# Altium PCB OBD-II.PcbDoc
Units mil, origin at the board's own origin, x right, y up, seen from the top; angles counter-clockwise.
Board outline 2675 x 2505 mil, 2 copper layers (Top Layer, Bottom Layer); 60 components, 38 nets, 247 pads, 153 vias.
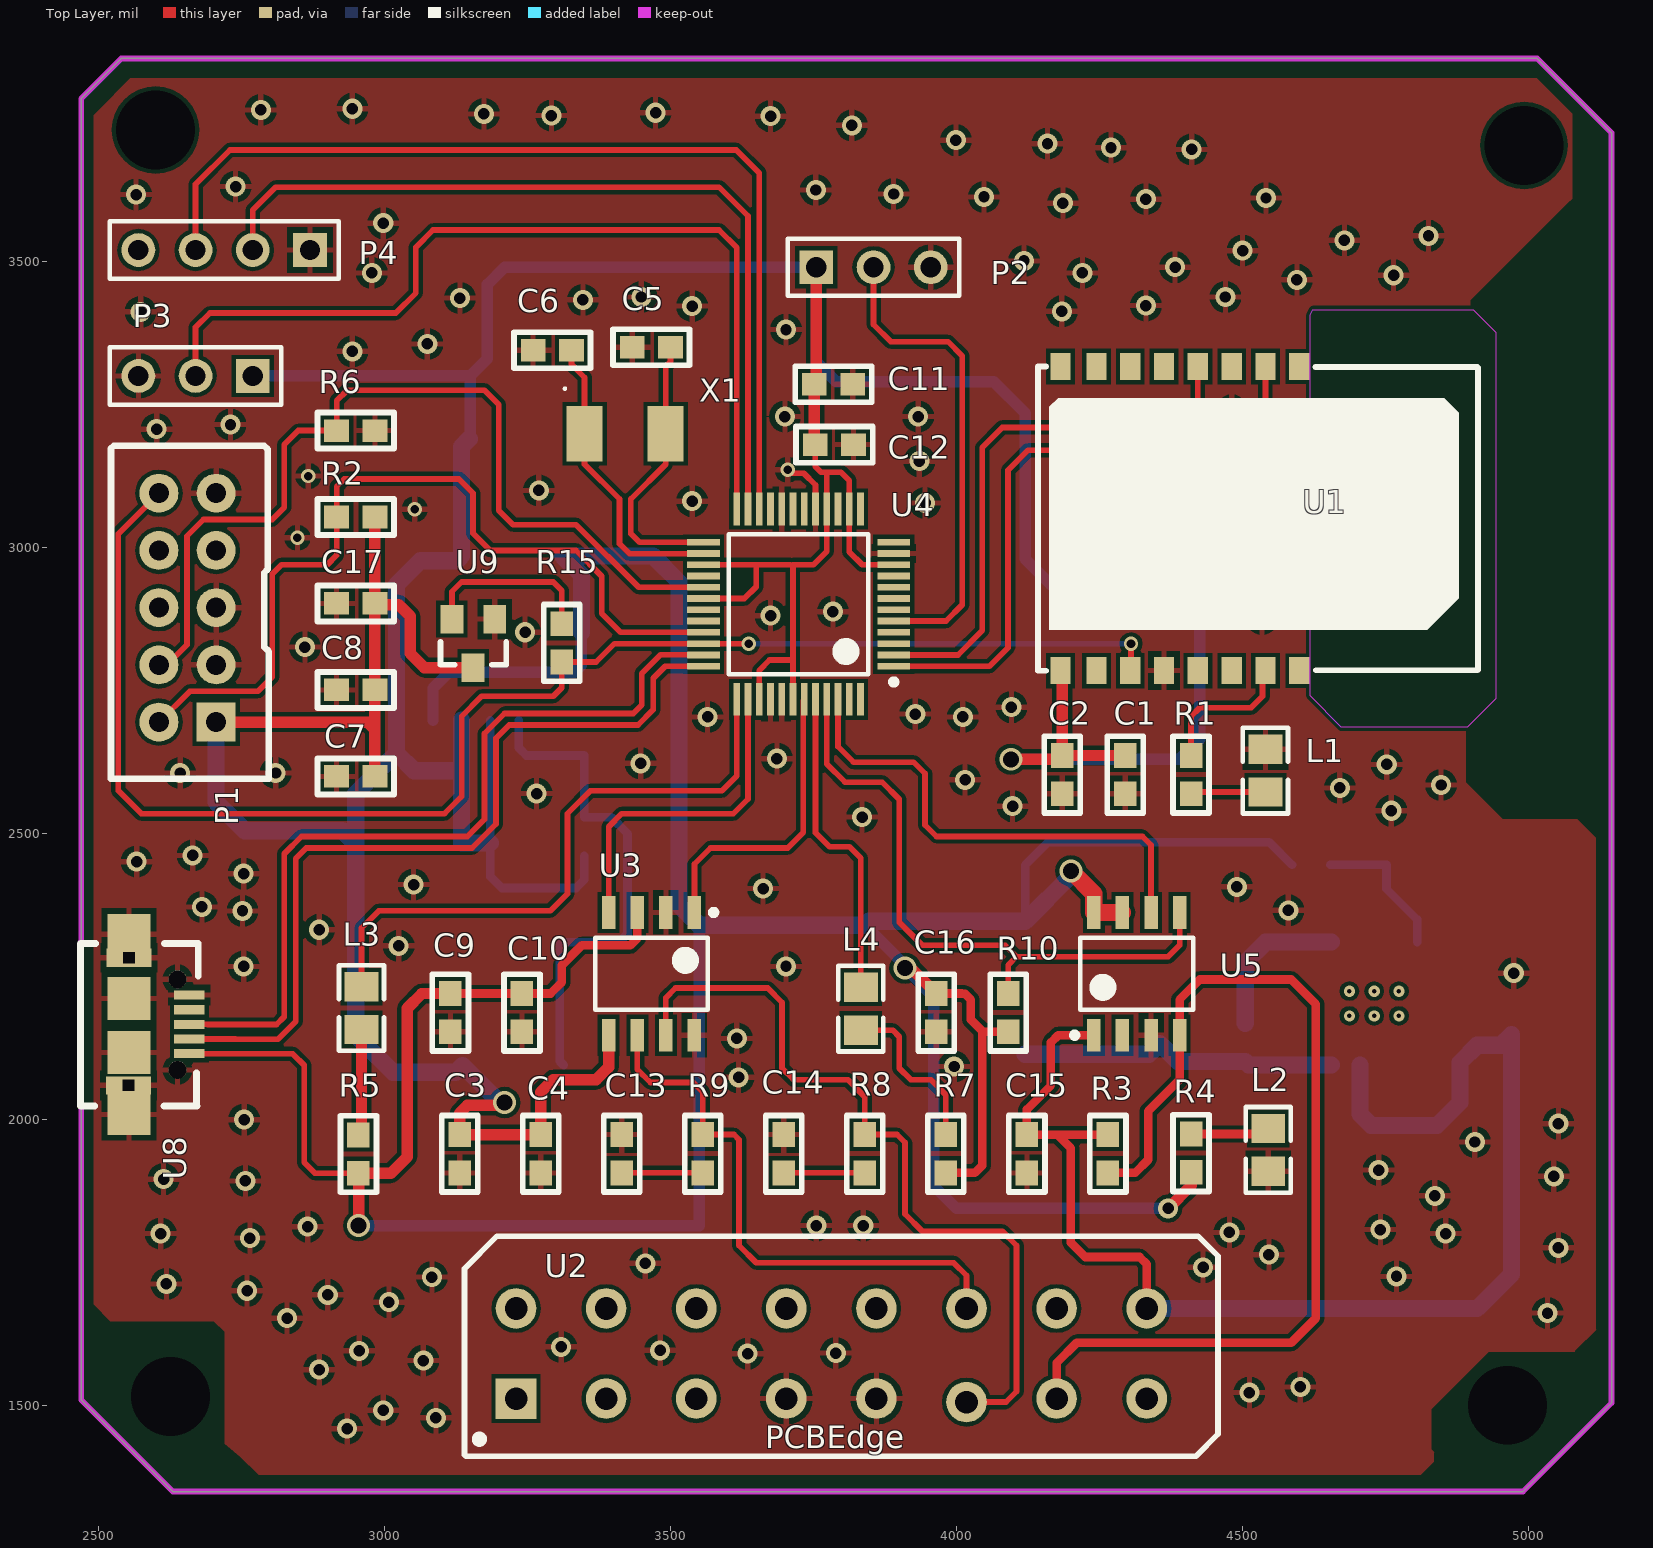
[diagram p0: Top Layer view]
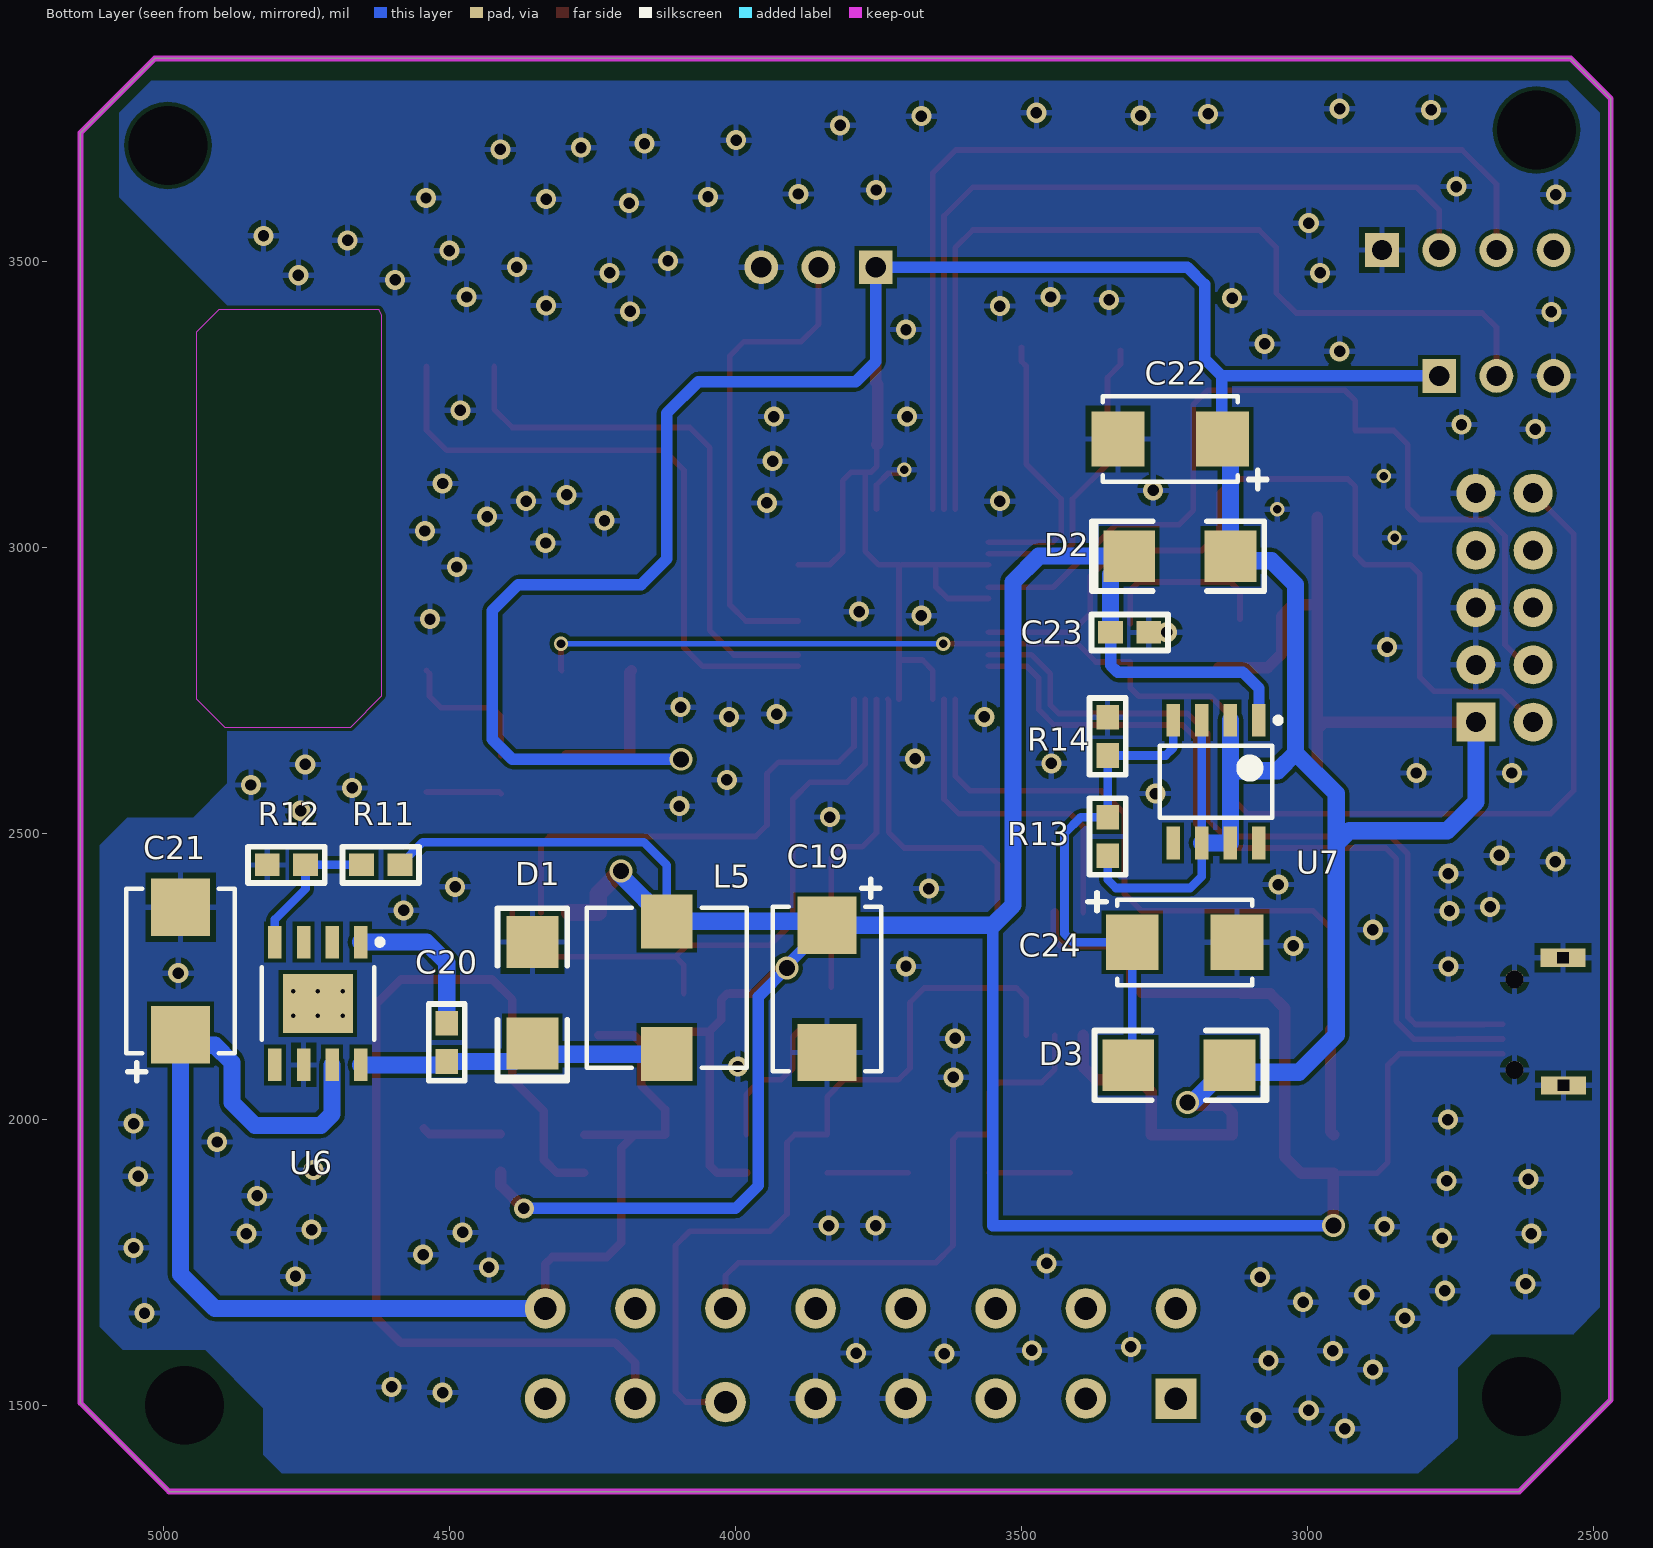
[diagram p1: Bottom Layer view, seen from below]

## Layer stack, top to bottom
Top Solder: solder mask 0.4, Solder Resist, Dk 3.5
Top Layer: signal copper 1.4
Dielectric 1: dielectric 12.6, FR-4, Dk 4.8
Bottom Layer: signal copper 1.4
Bottom Solder: solder mask 0.4, Solder Resist, Dk 3.5

## Board outline
2470,1510 2470,3785 2540,3855 5015,3855 5145,3725 5145,1505 4990,1350 2630,1350

## Design rules (kind name [scope] priority, off if disabled: settings)
Clearance [All] p1: gap=7
DiffPairsRouting [All] p1: maxlimit=10 minlimit=10 mostfreqgap=10 toplayer_minwidth=10 toplayer_maxwidth=15 toplayer_prefwidth=15 bottomlayer_minwidth=10 bottomlayer_maxwidth=15 bottomlayer_prefwidth=15 maxuncoupledlength=500
PolygonConnect [All] p1: connectstyle=Relief reliefconductorwidth=10 reliefentries=4 polygonreliefangle="90 Angle" airgapwidth=10
RoutingVias [All] p1: holewidth=28 width=40 viastyle="Through Hole" minholewidth=15 minwidth=25 maxholewidth=30 maxwidth=40
SolderMaskExpansion [All] p1: expansion=4
Width [All] p1: maxlimit=50 minlimit=10 preferedwidth=15
29 further rules are at their usual default settings.

## Classes and differential pairs
component class USB: U8
component class Power: C19 C20 C21 C22 C23 C24 D1 D2 D3 L5 R11 R12 R13 R14 U6 U7
component class Core: C3 C4 C5 C6 C7 C8 C9 C10 C11 C12 C13 C14 C15 C16 C17 L2 L3 L4 P1 P2 P3 P4 R2 R3 R4 R5 R6 R7 R8 R9 R10 R15 U2 U3 U4 U5 U9 X1
component class Bluetooth: C1 C2 L1 R1
differential pair NewDifferentialPair1: +D+ -D-
differential pair NewDifferentialPair2: +NetC5_1 -NetC6_1

## Components (designator, comment, footprint, x,y, rotation, side; value= is the part's Value field where it differs from the comment)
C1 "0.1uF" 0603 4295.39,2603.13 r90 top
C2 "10uF" 0603 4185.39,2603.13 r90 top
C3 "10uF" 0603 3132.02,1940.53 r90 top
C4 "0.1uF" 0603 3273.64,1940.53 r90 top
C5 "22pF" 0603 3466.54,3350.39 r180 top
C6 "22pF" 0603 3293.46,3345.39 r180 top
C7 "4.7uF" 0603 2950,2599.61 r0 top
C8 "0.1uF" 0603 2950,2750.76 r0 top
C9 "10uF" 0603 3115,2187.1 r270 top
C10 "0.1uF" 0603 3240,2187.1 r270 top
C11 "10uF" 0603 3785,3285 r0 top
C12 "0.1uF" 0603 3786.54,3179.61 r0 top
C13 "560pF" 0603 3414.47,1940.53 r270 top
C14 "560pF" 0603 3697.72,1940.53 r270 top
C15 "0.1uF" 0603 4122.59,1940.53 r270 top
C16 "0.1uF" 0603 3965,2187.1 r90 top
C17 "0.1uF" 0603 2950,2901.91 r0 top
C19 "220uF" CAPM-7.0*4.5 3840,2228.67 r270 bottom
C20 "0.01uF" 0603 4505,2135.18 r270 bottom
C21 "100uF/16V" CAPM-7.0*4.5 4970,2260 r90 bottom
C22 "10uF/16V" CAPM-5.5*3.3 3240,3190 r0 bottom
C23 "0.1uF" 0603 3311,2852 r0 bottom
C24 "10uF/16V" CAPM-5.5*3.3 3215,2310 r180 bottom
D1 "B340A" DO214-AC 4355,2221.8 r270 bottom
D2 "1N4007" DO214-AC 3223.25,2985 r0 bottom
D3 "1N4007" DO214-AC 3225,2095 r180 bottom
L1 "LED" 0805 4540,2610 r90 top
L2 "LED" 0805 4545,1947.4 r270 top
L3 "LED" 0805 2960,2195 r90 top
L4 "LED" 0805 3832.86,2193.98 r90 top
L5 "15uH" 7*7*4-15uH 4120,2230.64 r90 bottom
P1 "Debug" JATG_10pin 2705.97,2695 r180 top
P2 "" HDR1X3 3755,3490 r0 top
P3 "" HDR1X3 2770,3300 r180 top
P4 "downloader" HDR1X4 2870,3520 r180 top
R1 "470" 0603 4409.61,2603.13 r270 top
R2 "10K" 0603 2950,3053.85 r180 top
R3 "510R" 0603 4265,1940.53 r90 top
R4 "330R" 0603 4410.39,1941.54 r90 top
R5 "330R" 0603 2955,1940 r90 top
R6 "10K" 0603 2950,3205 r180 top
R7 "330R" 0603 3981.75,1940.53 r90 top
R8 "100R" 0603 3840.13,1940.53 r90 top
R9 "100R" 0603 3556.89,1940.53 r90 top
R10 "3.3K" 0603 4090,2187.1 r270 top
R11 "10K" 0603 4620,2445 r180 bottom
R12 "3.24K" 0603 4785,2445 r180 bottom
R13 "470R" 0603 3350,2495 r270 bottom
R14 "820R" 0603 3350,2670 r270 bottom
R15 "100K" 0603 3310.39,2833.46 r90 top
U1 "HM-13" HM-13 4142.36,3316.5 r270 top
U2 "OBD-Connector" OBD-MaleConnector 3230.08,1512.52 r0 top
U3 "TJF1051T / 3" TJF1051 3460,2253 r270 top
U4 "LPC1549" LPC1549JBD48 3725,2905 r180 top
U5 "MC33660EFR2" SOP-8 4315,2255 r90 top
U6 "TPS5430" TPS5430 4730,2203.08 r270 bottom
U7 "LM317L" LM317L 3160,2590 r270 bottom
U8 "MicroUSB" Micro-USB 2553.68,2324.07 r0 top
U9 "IMP809TEUR-T" SOT23-3 3155,2790 r180 top
X1 "12MHZ" 12Mhz-DFN 3420,3200 r180 top

## Footprints (in the part's own frame and the unit in brackets; to place one, negate y for a bottom-side part, rotate by r counter-clockwise, add the part's x,y. Pads: shape width x height; smd on the part's side, far side on the other; paste and mask are expansions set on the pad)
7*7*4-15uH [mm] "Precision Wire Wound Inductor, 2-Leads, Body 7.00x7.00mm, IPC Medium Density"
  rect 2.4x2.3 smd: 1(-2.95,0) 2(2.95,0)
  silkscreen extent -3.55,-3.55 3.55,3.55
12Mhz-DFN [mm]
  rect 1.6x2.45 smd: 1(1.78,0.025) 2(-1.82,0.025)
  silkscreen extent 2.6,-2.02 2.7,-1.92, body extent -2.65,-1.57 2.65,1.63, height 0.45
0603 [mm]
  rect 1.1x1 smd: 1(-0.85,0.01) 2(0.85,0.01)
  silkscreen extent -1.7,-0.79 1.7,0.81
0805 [mm]
  rect 1.3x1.5 smd: 1(-0.95,0) 2(0.95,0)
  silkscreen extent -1.9,-1 1.9,1
CAPM-5.5*3.3 [mm]
  rect 2.35x2.45 smd: 1(-2.325,0) 2(2.325,0)
  silkscreen extent -4.29,-1.9 3,2.2
CAPM-7.0*4.5 [mm] "Molded Capacitor, 2-Leads, Body 7.00x4.50mm, IPC Medium Density"
  rect 2.55x2.6 smd: 1(-2.825,0) 2(2.825,0)
  silkscreen extent -4.87,-2.4 3.65,2.4
DO214-AC [mm]
  rect 2.3x2.3 smd: 1(-2.25,0) 2(2.25,0)
  silkscreen extent -3.75,-1.55 3.9,1.55
HDR1X3 [mm] "Connector; Header; 3 Position"
  rect 1.5x1.5 hole 0.9: 1(0,0)
  round 1.5 hole 0.9: 2(2.54,0) 3(5.08,0)
  silkscreen extent -1.27,-1.27 6.35,1.27
HDR1X4 [mm] "Connector; Header; 4 Position"
  rect 1.5x1.5 hole 0.9: 1(0,0)
  round 1.5 hole 0.9: 2(2.54,0) 3(5.08,0) 4(7.62,0)
  silkscreen extent -1.27,-1.27 8.89,1.27
HM-13 [mm]
  rect 1.2x0.9 smd: 1(0,11.6) 2(0,10.1) 3(0,8.6) 4(0,7.1) 5(0,5.6) 6(0,4.1) 7(0,2.6) 8(0,1) 9(13.5,1) 10(13.5,2.6) 11(13.5,4.1) 12(13.5,5.6) 13(13.5,7.1) 14(13.5,8.6) 15(13.5,10.1) 16(13.5,11.6)
  silkscreen extent 0,0 13.51,19.53
JATG_10pin [mil]
  rect 68x68 hole 35: 1(0,0)
  round 68 hole 35: 2(100,0) 3(0,-100) 4(100,-100) 5(0,-200) 6(100,-200) 7(0,-300) 8(100,-300) 9(0,-400) 10(100,-400)
  silkscreen extent -92,-483 184,99
LM317L [mm]
  rect 1.45x0.6 smd: 1(-2.75,1.905) 2(-2.75,0.635) 3(-2.75,-0.635) 4(-2.75,-1.905) 5(2.7,-1.905) 6(2.7,-0.635) 7(2.7,0.635) 8(2.7,1.905)
  silkscreen extent -2.88,-2.5 1.57,2.88
LPC1549JBD48 [mm]
  rect 1.45x0.3 smd: 1(-4.2,2.852) 2(-4.2,2.352) 3(-4.2,1.852) 4(-4.2,1.352) 5(-4.2,0.852) 6(-4.2,0.352) 7(-4.2,-0.148) 8(-4.2,-0.648) 9(-4.2,-1.148) 10(-4.2,-1.648) 11(-4.2,-2.148) 12(-4.2,-2.648) 25(4.25,-2.648) 26(4.25,-2.148) 27(4.25,-1.648) 28(4.25,-1.148) 29(4.25,-0.648) 30(4.25,-0.148) 31(4.25,0.352) 32(4.25,0.852) 33(4.25,1.352) 34(4.25,1.852) 35(4.25,2.352) 36(4.25,2.852)
  rect 0.3x1.45 smd: 13(-2.725,-4.123) 14(-2.225,-4.123) 15(-1.725,-4.123) 16(-1.225,-4.123) 17(-0.725,-4.123) 18(-0.225,-4.123) 19(0.275,-4.123) 20(0.775,-4.123) 21(1.275,-4.123) 22(1.775,-4.123) 23(2.275,-4.123) 24(2.775,-4.123) 37(2.775,4.327) 38(2.275,4.327) 39(1.775,4.327) 40(1.275,4.327) 41(0.775,4.327) 42(0.275,4.327) 43(-0.225,4.327) 44(-0.725,4.327) 45(-1.225,4.327) 46(-1.725,4.327) 47(-2.225,4.327) 48(-2.725,4.327)
  silkscreen extent -4.32,-3 3.13,3.68
Micro-USB [mm]
  rect 2x0.8 hole 0.5 square: 1(-0.025,-6.706) 1(0,-1.041)
  rect 1.9x1.8 smd: 1(0,-8) 1(0,0)
  rect 1.9x1.9 smd: 1(0,-5.25) 1(0,-2.85)
  round 0.8 hole 0.8: 1(2.15,-6.02) 1(2.15,-2)
  rect 1.35x0.4 smd: 1(2.675,-2.7) 2(2.675,-3.35) 3(2.675,-4) 4(2.675,-4.65) 5(2.675,-5.3)
  silkscreen extent -2.16,-7.62 3.07,-0.41
OBD-MaleConnector [mm]
  rect 1.8x1.8 hole 1: 1(0,0)
  round 1.8 hole 1: 2(4,0) 3(8,0) 4(12,0) 5(16,0) 6(20,-0.152) 7(24,0) 8(28,0) 9(0,4) 10(4,4) 11(8,4) 12(12,4) 13(16,4) 14(20,4) 15(24,4) 16(28,4)
  silkscreen extent -2.29,-2.57 31.17,7.21
SOP-8 [mm]
  rect 1.45x0.6 smd: 1(-2.725,1.905) 2(-2.725,0.635) 3(-2.725,-0.635) 4(-2.725,-1.905) 5(2.725,-1.905) 6(2.725,-0.635) 7(2.725,0.635) 8(2.725,1.905)
  silkscreen extent -2.85,-2.5 1.6,2.88
SOT23-3 [mil]
  rect 40x50 smd: 1(-37.99,-85) 2(37.01,-85) 3(0.01,0)
  silkscreen extent -58,-45 57,-5
TJF1051 [mm]
  rect 1.45x0.6 smd: 1(-2.776,2.083) 2(-2.776,0.813) 3(-2.776,-0.457) 4(-2.776,-1.727) 5(2.674,-1.727) 6(2.674,-0.457) 7(2.674,0.813) 8(2.674,2.083)
  silkscreen extent -2.9,-2.32 1.55,3.06
TPS5430 [mm]
  rect 1.45x0.6 smd: 1(-2.725,1.905) 2(-2.725,0.635) 3(-2.725,-0.635) 4(-2.725,-1.905) 5(2.725,-1.905) 6(2.725,-0.635) 7(2.725,0.635) 8(2.725,1.905)
  rect 2.6x3.1 smd: 9(0,0)
  silkscreen extent -2.85,-2.5 1.6,2.88

## Part data
C1 C2 C3 C4 C5 C6 C7 C8 C9 C10 C11 C12 C13 C14 C15 C16 C17 C20 C23: library part Cap1, "ceramic"
C19 C21 C22 C24: library part Cap3, "aluminum"
D1: library part B340A-13-F
L5: library part Inductor
P1: library part JTAG_10Pin
P2 P3: library part "Header 3", "Header, 3-Pin"
P4: library part "Header 4", "Header, 4-Pin"
R1 R2 R3 R4 R5 R6 R7 R8 R9 R10 R11 R12 R13 R14 R15: library part Res
U2: library part OBD-MaleHead
U4: library part LPC1549JBD48
U8: library part MicroUSB_B
X1: library part OSC

## Free pads (board coordinates)
  oval 0x141.73 hole 137.8: 0(2626,1516) 1(4963,1501) 2(4992,3703) 3(2600,3730)

## Via types
v1: diameter 35, hole 20, Top Layer to Bottom Layer, 136 vias
v2: diameter 25, hole 15, Top Layer to Bottom Layer, 6 vias
v3: diameter 19.68, hole 7.87, Top Layer to Bottom Layer, 6 vias
v4: diameter 40, hole 28, Top Layer to Bottom Layer, 5 vias

## Nets (pads, with @x,y where several pads share a name; then routed paths per layer and width w, separated by ;. In a path a pad name is that pad's centre, name@x,y a point inside that pad or via, vN(x,y) a via of type N, cw(c..) or ccw(c..) an arc to the next point about the centre after c; other vN are vias at no path point)
3.3V: C1.2 C2.2 C3.2 C4.2 C7.2 C8.2 C11.1 C12.1 C17.2 C22.1 D2.1 D3.2 P1.1 P2.1 P3.1 R2.1 R13.2 U1.9 U3.5 U4.10 U4.14 U4.16 U4.27 U4.30 U4.39 U4.42 U7.2 U7.3 U7.6 U7.7 U9.3 | length 9140.4
  Top Layer w10: U4.30 3629.16,2910.84 3650,2931.68 3650,2969.9 ; U4.27 3650,2969.9 ; U4.39 3655.1,2785.1 3673.32,2803.32 3710.83,2803.32 3714.16,2800 ; 3710,2969.9 3650,2969.9 ; U4.42 3714.16,2800 ; C12.1 3753.07,3141.93 3763.21,3131.79 3773.21,3131.79 ; U4.10 3835.1,2969.9 3812.58,2992.42 U4.14 3812.58,3117.42 3798.21,3131.79 3773.21,3131.79 ; 3714.16,2800 3714.16,2969.9 3749.9,2969.9 3773.21,2993.21 U4.16 3773.21,3131.79
  Top Layer w20: P1.1 2970,2695 2983.46,2681.54 ; C7.2 2983.46,2681.54 ; R2.1 C17.2 ; U9.3 3070,2790 3045,2815 3045,2880 3025,2900 2985.77,2900 C17.2 ; v4(3210,2030) 3205,2025 3145,2025 3131.62,2011.62 C3.2 C4.2 3273.25,2048.25 3295,2070 3370,2070 3392,2092 U3.5 ; C12.1 3751.54,3181.54 C11.1 3755,3288.86 P2.1 ; v4(4095,2630) 4178.41,2630 C2.2 ; U1.9 4185,2781.73 C2.2 ; C1.2 C2.2 ; 2983.46,2681.54 C8.2 C17.2
  Bottom Layer w15: U7.3 U7.6 3185,2425 3205,2405 3335,2405 3349.61,2419.61 R13.2
  Bottom Layer w20: P1.1 P1.1@2713,2687.97 ; P3.1 3150,3300 ; C22.1 3150,3191.54 3150,3300 ; v4(4095,2630) 4390,2630 4425,2665 4425,2890 4380,2935 4165,2935 4120,2980 4120,3235 4065,3290 3790,3290 3755,3325 P2.1 3210,3490 3180,3460 3180,3330 3150,3300
  Bottom Layer w30: P1.1 2705.97,2555.03 2756,2505 2927,2505 2950,2482 ; U7.2 3135,2600 ; C22.1 3134.67,3176.2 D2.1 3126.67,2977 3063,2977 3021,2935 3021,2641 ; U7.6 U7.7 3135,2600 ; v4(3210,2030) 3201.42,2030 D3.2 3124.42,2083 3015,2083 2950,2148 2950,2482 ; 2950,2482 2950,2570 3021,2641 ; 3021,2641 3052,2610 3125,2610 3135,2600
5V: C9.1 C10.1 C16.2 C19.1 C23.2 D2.2 L5.2 R4.1 R5.1 R7.1 R10.2 R11.2 U3.3 U5.7 U5.8 U7.1 U8.5 | length 6931.4
  Top Layer w10: U8.5 2659.33,2115.08 2839.92,2115.08 2860,2095 2860,1925 2878.46,1906.54 R5.1
  Top Layer w15: C9.1 C10.1 3290.57,2220.57 3310,2240 3310,2270 3345,2305 3430,2305 3442,2317 U3.3 ; C16.2 4009.43,2220.57 4010,2220 4015,2220 4025,2210 4025,2175 4045,2155 ; R7.1 4032.06,1907.06 4045,1920 4045,2155 ; R10.2 4046.36,2153.64 4045,2155
  Top Layer w20: v4(2955,1815) 2955,1906.14 R5.1 3011.54,1906.54 3040,1935 3040,2195 3065.57,2220.57 C9.1 ; v4(3910,2265) 3920.17,2265 C16.2 ; v1(4370,1845) 4410,1885 R4.1
  Top Layer w30: v4(4200,2435) 4240,2395 U5.8 U5.7
  Bottom Layer w15: L5.2 4120,2445 4160,2485 4546.93,2485 R11.2
  Bottom Layer w20: v4(2955,1815) 3550.11,1815 3550.11,2339.89 ; U7.1 3085,2754 3113,2782 3332,2782 3344.46,2794.46 C23.2 ; C19.1 3910,2269.89 v4(3910,2265) 3960,2215 3960,1885 4000,1845 v1(4370,1845)
  Bottom Layer w30: C23.2 3344.46,2952.37 D2.2 3470,2985 3515,2940 3515,2375 3550.11,2339.89 C19.1 3846.89,2346.78 L5.2 4200,2426.78 v4(4200,2435)
12V: C15.1 C21.1 R3.2 U2.16 U5.1 U6.7 | length 2371.8
  Top Layer w15: U5.1 4177.72,2147.72 4165,2135 4165,2060 4122.98,2017.98 C15.1 4176.01,1973.99 ; R3.2 4176.01,1973.99 ; U2.16 4332.44,1747.56 4320,1760 4225,1760 4200,1785 4200,1950 4176.01,1973.99
  Bottom Layer w30: U2.16 4910,1670 4970,1730 C21.1 4951.22,2130 4910,2130 4880,2100 4880,2030 4840,1990 4725,1990 4705,2010 U6.7
ADJ: C24.1 D3.1 R13.1 R14.2 U7.4 | length 881.3
  Bottom Layer w15: U7.4 3235,2650 3248.46,2636.54 R14.2 R13.1 3396.54,2528.46 3425,2500 3425,2325 3410,2310 C24.1 3306.54,2102.05 D3.1
BL_RX: U1.4 U4.2 | length 971.5
  Top Layer w10: U4.2 4002.42,2812.42 4045,2855 4045,3175 4080,3210 4390,3210 4421.89,3241.89 U1.4
BL_TX: U1.2 U4.1 | length 1113.5
  Top Layer w10: U4.1 4057.73,2792.73 4090,2825 4090,3135 4125,3170 4505,3170 4540,3205 U1.2
BOOT: C20.1 U6.1 | length 271.2
  Bottom Layer w30: C20.1 4504.61,2274.61 4540.36,2310.36 U6.1
CAN_H: R8.2 U2.6 U3.7 | length 1401.3
  Top Layer w10: U3.7 3492,2213 3509,2230 3670,2230 3695,2205 3695,2090 3715,2070 3810,2070 3839.74,2040.26 R8.2 3896.01,1973.99 3910,1960 3910,1835 3940,1805 4080,1805 4105,1780 4105,1525 4086.52,1506.52 U2.6
CAN_L: R9.2 U2.14 U3.6 | length 994.1
  Top Layer w10: U3.6 3442,2088 3465,2065 3540,2065 3556.49,2048.51 R9.2 3611.01,1973.99 3620,1965 3620,1780 3650,1750 3995,1750 4017.48,1727.52 U2.14
D+: U4.35 U8.3 | length 1453.6
  Top Layer w10: U8.3 2690.57,2166.59 2690.91,2166.26 2811.26,2166.26 2825,2180 2825,2465 2855,2495 3145,2495 3175,2525 3175,2675 3210,2710 3435,2710 3450,2725 3450,2780 3482.73,2812.73 U4.35@3557.66,2812.73
D-: U4.36 U8.4 | length 1455.9
  Top Layer w10: U8.4 2739.95,2141 2740.28,2140.67 2813.95,2140.67 2845,2171.72 2845,2456.72 2863.28,2475 3153.28,2475 3195,2516.72 3195,2666.72 3218.28,2690 3443.28,2690 3470,2716.72 3470,2771.72 3491.02,2792.73 U4.36
GND: C1.1 C2.1 C3.1 C4.1 C5.2 C6.2 C7.1 C8.1 C9.2 C10.2 C11.2 C12.2 C13.1 C14.1 C15.2 C16.1 C17.1 C19.2 C21.2 C22.2 C23.1 C24.2 D1.1 L1.2 L2.2 P1.3 P1.5 P1.9 P2.3 P3.3 P4.1 R6.1 R12.1 R14.1 U1.12 U2.4 U2.5 U3.2 U3.8 U4.11 U4.17 U4.20 U4.40 U4.41 U5.3 U6.6 U8.1 U9.1 | length 101.6
  Top Layer w10: v2(3705,3136) 3711,3130 3733,3130 3753.53,3109.47 U4.17
  other v1: 2935,1460 3090,1479 2998,1492 4512,1523 4601,1533 2886,1563 3068,1579 3635,1591 3789,1592 2956,1596 3482,1597 3309,1603 2830,1653 5033,1662 3008,1681 2901,1694 2760,1701 2619,1713 3083,1725 4769,1726 4431,1742 3456,1749 4546,1764 5052,1776 2765,1793 2609,1801 4855,1801 4477,1803 4741,1808 2866,1813 3755,1815 3837,1815 4836,1867 2757,1893 2614,1896 5044,1901 4738,1912 4906,1961 5052,1993 2755,2000 3619,2074 3996,2093 3616,2142 4974,2256 2754,2268 3702,2268 3025,2304 2886,2332 2752,2365 4580,2366 2681,2372 3662,2404 4490,2407 3051,2411 2754,2430 2567,2451 2665,2462 3835,2529 4760,2540 4098,2548 3266,2570 4670,2580 4847,2585 4015,2594 2643,2606 2810,2606 4752,2621 3448,2623 3686,2631 3565,2704 4011,2704 3928,2709 4096,2721 2861,2826 3246,2852 4534,2875 3675,2881 3784,2888 4487,2966 4332,3008 4543,3029 4229,3047 4434,3054 3945,3078 3538,3081 4366,3081 4295,3092 3270,3100 4512,3112 3935,3151 2602,3207 2731,3215 3700,3229 3933,3229 4481,3240 2944,3343 3075,3356 3702,3381 2574,3412 4184,3413 3538,3422 4331,3423 3347,3433 3132,3436 3449,3438 4470,3438 4595,3468 4764,3476 2978,3480 4220,3480 4382,3490 4118,3501 4500,3519 4678,3537 4825,3545 2998,3567 4186,3602 4331,3609 4541,3611 4048,3613 2566,3617 3890,3618 3754,3625 2740,3631 4411,3696 4270,3699 4159,3706 3999,3712 3817,3738 3675,3754 3292,3755 3174,3758 3474,3760 2784,3765 2944,3767
  other v2: 2848,3017 3053,3067 2867,3125
ISP0: P2.2 U4.5 | length 844.3
  Top Layer w10: P2.2 3855,3390 3885,3360 3985,3360 4010,3335 4010,2900 3981.47,2871.47 U4.5
ISP1: P3.2 U4.24 | length 1617.7
  Top Layer w10: P3.2 2670,3385 2695,3410 3020,3410 3055,3445 3055,3525 3085,3555 3585,3555 3615.73,3524.27 U4.24
K-LINE: R3.1 U2.7 U5.4 | length 1749.8
  Top Layer w15: U2.7 4174.96,1574.96 4210,1610 4585,1610 4628,1653 4628,2202 4585,2245 4425,2245 4390,2210 U5.4 4390,2070 4335,2015 4335,1930 4312.06,1907.06 R3.1
NetC5_1: C5.1 U4.25 X1.2 | length 487.5
  Top Layer w10: C5.1 3500,3325.32 3491.65,3316.97 X1.2 3491.65,3145.77 3430.79,3084.91 3430.79,3024.21 3445.73,3009.27 U4.25
NetC6_1: C6.1 U4.26 X1.1 | length 527.1
  Top Layer w10: C6.1 3326.93,3320.32 3349.92,3297.32 X1.1 3349.92,3145.77 3410.79,3084.91 3410.79,3006.72 3428.24,2989.27 U4.26@3557.66,2989.27
NetC13_2: C13.2 R9.1 | length 141.6
  Top Layer w10: C13.2 R9.1
NetC14_2: C14.2 R8.1 | length 141.6
  Top Layer w10: C14.2 R8.1
NetC20_2: C20.2 D1.2 L5.1 U6.8 | length 558.3
  Bottom Layer w30: L5.1 4336.28,2114.5 D1.2 4386.5,2101.72 C20.2 4510.53,2095.8 U6.8
NetL1_1: L1.1 R1.2 | length 131.2
  Top Layer w10: R1.2 4412.94,2572.6 L1.1
NetL2_1: L2.1 R4.2 | length 139.1
  Top Layer w15: R4.2 4535.2,1975 L2.1
NetL3_1: L3.1 R5.2 | length 186.4
  Top Layer w20: R5.2 2960,1978.86 L3.1
NetL4_1: L4.1 R7.2 | length 297.1
  Top Layer w10: L4.1 3888.43,2156.57 3900,2145 3900,2090 3920,2070 3955,2070 3981.36,2043.64 R7.2
NetR1_1: R1.1 U1.15 | length 255
  Top Layer w10: R1.1 4410,2705 4425,2720 4515,2720 4535,2740 4535,2780 U1.15
NetR10_1: R10.1 U4.45 U5.5 | length 1131.2
  Top Layer w10: U4.45 3773.21,2621.79 3805,2590 3870,2590 3900,2560 3900,2345 3940,2305 4085,2305 4105,2285 ; R10.1 4090.39,2270.39 4105,2285 ; U5.5 4390,2305 4370,2285 4105,2285
NetR15_2: R15.2 U9.2 | length 311.3
  Top Layer w10: U9.2 3117.99,2922.99 3135,2940 3295,2940 3310,2925 R15.2
NetU3_1: U3.1 U4.43 | length 530.9
  Top Layer w10: U3.1 3542,2447 3570,2475 3705,2475 3732.06,2502.06 3732.06,2732.88 U4.43
NetU3_4: U3.4 U4.38 | length 587.4
  Top Layer w10: U3.4 3392,2512 3415,2535 3610,2535 3635.42,2560.42 U4.38
NetU4_46: U4.46 U5.6 | length 871.4
  Top Layer w10: U4.46 3792.9,2652.1 3820,2625 3925,2625 3945,2605 3945,2515 3965,2495 4325,2495 4340,2480 U5.6
PIN_37: L3.2 U4.37 | length 1084.3
  Top Layer w10: L3.2 2960,2335 2990,2365 3290,2365 3320,2395 3320,2535 3360,2575 3590,2575 3615.73,2600.73 U4.37
PIN_44: L4.2 U4.44 | length 556.6
  Top Layer w10: U4.44 3753.53,2501.47 3777.86,2477.14 3812.86,2477.14 3832.86,2457.14 L4.2
R\S\T\: P1.10 R15.1 U1.11 U4.34 | length 2615
  Top Layer w10: P1.10 2535,3024.03 2535,2575 2575,2535 3105,2535 3135,2565 3135,2705 3170,2740 3295,2740 3310,2755 R15.1 3370,2800 3402.1,2832.1 U4.34 v2(3637.1,2832.1) ; U1.11 4305,2786.22 v2(4305,2832.1)
  Bottom Layer w10: v2(3637.1,2832.1) v2(4305,2832.1)
RX: P4.3 U4.22 | length 1754.1
  Top Layer w10: P4.3@2670,3495 P4.3 2670,3635 2730,3695 3615,3695 3655.1,3654.9 U4.22
SWDCLK: P1.4 R6.2 U4.29 | length 1607.7
  Top Layer w10: P1.4 2620,2795 2655,2830 2655,3020 2684,3049 2804,3049 2825,3070 2825,3180 2849.61,3204.61 R6.2 2916.54,3256.54 2935,3275 3175,3275 3200,3250 3200,3065 3225,3040 3335,3040 3444.47,2930.53 U4.29
SWDIO: P1.2 R2.2 U4.33 | length 1493.7
  Top Layer w10: P1.2 2660,2749.03 2686.88,2749.03 ; 2686.91,2749 2779,2749 2804,2774 2804,2954 2820,2970 2900,2970 2916.54,2986.54 R2.2 2916.54,3106.54 2930,3120 3130,3120 3155,3095 3155,3025 3185,2995 3335,2995 3380,2950 3380,2885 3413.21,2851.79 U4.33
TX: P4.2 U4.23 | length 1485.1
  Top Layer w10: P4.2 2770,3590 2810,3630 3585,3630 3635.42,3579.58 U4.23
VFB: R11.1 R12.2 U6.4 | length 255.2
  Bottom Layer w15: R11.1 R12.2 4751.54,2403.46 4805,2350 U6.4
pads on no net: P1.6 P1.7 P1.8 P4.4 U1.1 U1.3 U1.5 U1.6 U1.7 U1.8 U1.10 U1.13 U1.14 U1.16 U2.1 U2.2 U2.3 U2.8 U2.9 U2.10 U2.11 U2.12 U2.13 U2.15 U4.3 U4.4 U4.6 U4.7 U4.8 U4.9 U4.12 U4.13 U4.15 U4.18 U4.19 U4.21 U4.28 U4.31 U4.32 U4.47 U4.48 U5.2 U6.2 U6.3 U6.5 U6.9 U7.5 U7.8 U8.2
copper on no net:
  other v3: 4686.69,2181.43 4730,2181.43 4773.31,2181.43 4686.69,2224.73 4730,2224.73 4773.31,2224.73

## Polygon pours and split planes (outlines as drawn)
GND on Bottom Layer "GND" (solid, remove dead copper, pour order 6): 2738,1443 2738,1566 2721,1583 2679,1625 2535,1625 2535,1626 2496,1665 2489,1672 2489,2184 2489,3760 2492,3763 2545,3816 2624,3816 5021,3816 5050,3787 5077,3760 5077,3614 5077,3612 5029,3564 4888,3423 4888,3257 4888,2588 4890,2586 4948,2528 4975,2528 5063,2528 5097,2494 5111,2480 5111,2206 5111,1638 5097,1624 5071,1598 4953,1598 4927,1598 4828,1499 4825,1496 4825,1429 4825,1414 4813,1402 4793,1382 2807,1382
GND on Top Layer "GND" (solid, remove dead copper, pour order 10): 2721,1434 2721,1624 2721,1629 2705,1645 2702,1648 2580,1648 2521,1648 2500,1669 2492,1677 2492,1762 2492,3756 2499,3763 2556,3820 2568,3820 5014,3820 5068,3766 5076,3758 5076,3652 5076,3610 5067,3601 4898,3432 4898,3427 4898,3403 4901,3400 4908,3393 4908,3391 4908,2712 4890,2694 4890,2669 4890,2590 4948,2532 4955,2525 5080,2525 5085,2525 5106,2504 5117,2493 5117,2469 5117,1634 5118,1633 5081,1596 5081,1594 4930,1594 4914,1578 4830,1494 4830,1488 4830,1424 4835,1419 4834,1418 4834,1402 4822,1390 4811,1379 4800,1379 2780,1379 2748,1411

## Keep-outs
Keep-Out Layer:
  region: 4622.86,3416.11 4902.86,3416.11 4942.86,3376.11 4942.86,2736.11 4892.86,2686.11 4672.86,2686.11 4617.86,2741.11 4617.86,3406.11
  lines w10: 2470,1510 2630,1350 4990,1350 5145,1505 5145,3725 5015,3855 4870,3855 2540,3855 2470,3785 2470,3765 2470,1510

## Silkscreen, mask and mechanical layers (free items; w line width, h text height)
Top Overlay:
  region: 4162.5,2856 4162.5,3246 4177.5,3261 4852.5,3261 4877.5,3236 4877.5,2911 4822.5,2856

## Dimensions
2470,3765 to 5145,3725 on Top Overlay
2540,3855 to 2630,1350 on Top Overlay

## Text inside footprints (layer, text, board x,y; h text height)
U2: Top Overlay "PCBEdge" at 3666.08,1425.52 h39.37